# Altium PCB PCB1.PcbDoc (part 2 of 2)
Units mm, origin at the board's own origin, x right, y up, seen from the top; angles counter-clockwise.
Board outline 74.3 x 80 mm, 4 copper layers (Top Layer, GND_PLANE, PWR_PLANE, Bottom Layer), stack 0.603 mm thick; 83 components, 65 nets, 320 pads, 166 vias.
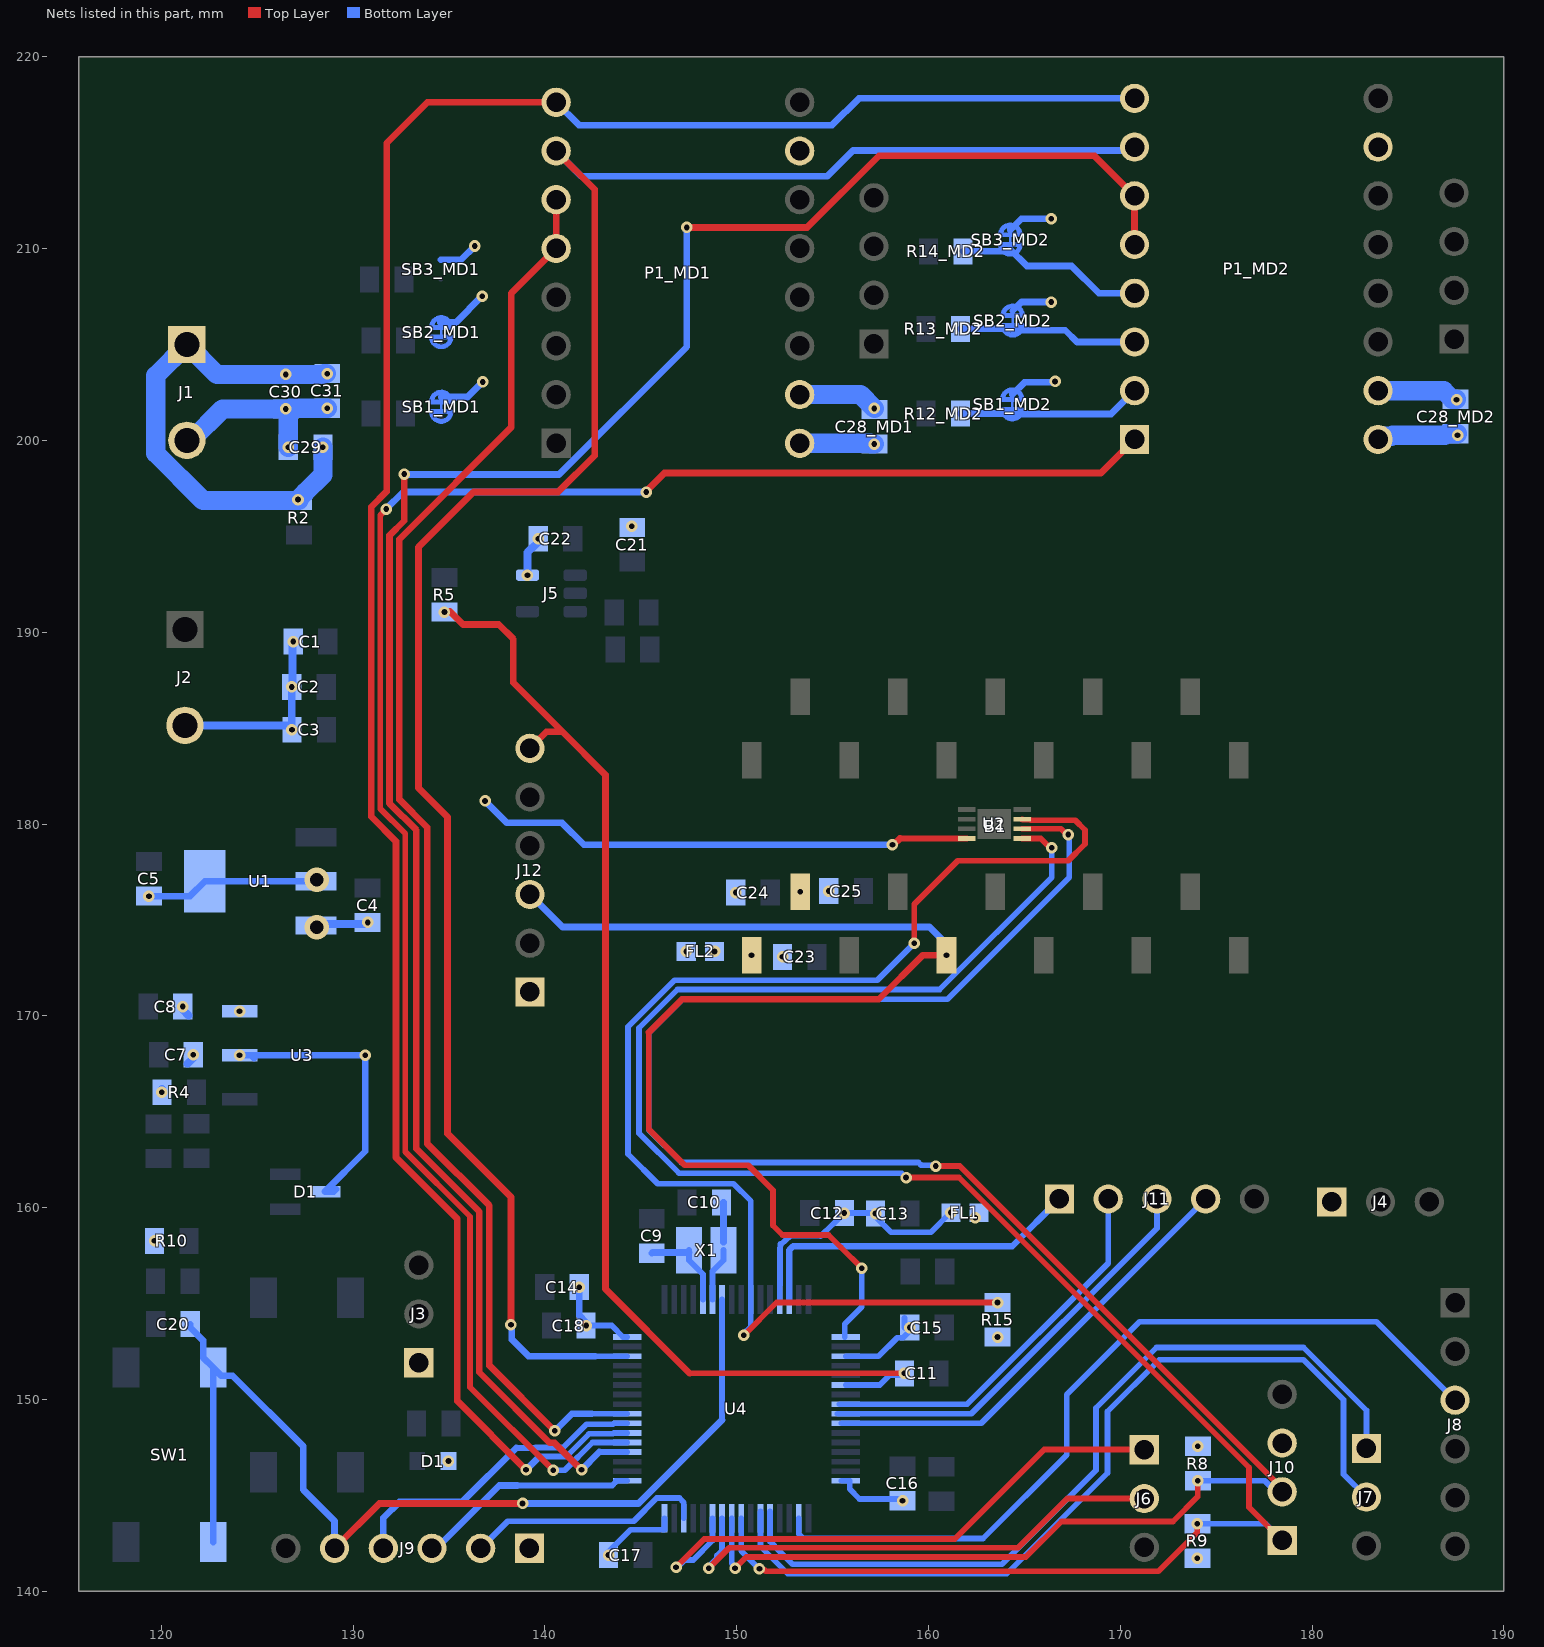
[diagram p4: the nets of this part, all layers, seen from the top]

## Via types
v1: diameter 0.6, hole 0.3, Top Layer to Bottom Layer, 163 vias
v2: diameter 1.27, hole 0.711, Top Layer to Bottom Layer, 3 vias

## Nets (pads, with @x,y where several pads share a name; then routed paths per layer and width w, separated by ;. In a path a pad name is that pad's centre, name@x,y a point inside that pad or via, vN(x,y) a via of type N, cw(c..) or ccw(c..) an arc to the next point about the centre after c; other vN are vias at no path point) (continued)
NetP1_MD1_5: P1_MD1.5 P1_MD1.6 U4.56 | length 75.1
  Top Layer w0.35: v1(140.513,148.361) 137.102,151.772 137.102,160.104 133.858,163.347 133.858,179.832 132.409,181.281 132.409,194.846 138.252,200.689 138.252,207.675 P1_MD1.5@140.585,210.008 P1_MD1.6@140.585,212.548
  Bottom Layer w0.3: 142.439,149.254 U4.56@144.287,149.254
  Bottom Layer w0.35: v1(140.513,148.361) 141.406,149.254 142.439,149.254
NetP1_MD1_7: P1_MD1.7 P1_MD2.7 U4.62 | length 108.9
  Top Layer w0.35: v1(138.227,153.899) 138.227,160.553 134.925,163.855 134.925,180.365 133.409,181.881 133.409,194.432 136.284,197.307 140.691,197.307 142.596,199.212 142.596,213.077 P1_MD1.7@140.585,215.088
  Bottom Layer w0.3: 142.621,152.254 U4.62@144.287,152.254
  Bottom Layer w0.35: v1(138.227,153.899) 138.275,153.851 138.275,153.114 139.134,152.254 142.621,152.254 ; P1_MD1.7@140.585,215.088 141.906,213.766 154.711,213.766 156.058,215.113 170.561,215.113 P1_MD2.7@170.739,215.29
NetP1_MD1_8: P1_MD1.8 P1_MD2.8 U4.54 | length 119.9
  Top Layer w0.35: v1(139.014,146.329) 135.433,149.911 135.433,159.41 132.232,162.611 132.232,179.095 130.945,180.383 130.945,196.522 131.75,197.327 131.75,215.494 133.884,217.628 P1_MD1.8@140.585,217.628
  Bottom Layer w0.3: 139.709,147.024 141.119,147.024 142.3,148.204 143.549,148.204 143.599,148.254 U4.54@144.287,148.254
  Bottom Layer w0.35: v1(139.014,146.329) 139.709,147.024 ; P1_MD1.8@140.585,217.628 141.779,216.433 154.968,216.433 156.365,217.83 P1_MD2.8@170.739,217.83
NetP1_MD2_1: P1_MD2.1 U4.53 | length 99
  Top Layer w0.3: v1(131.724,196.418) 131.724,196.397 131.42,196.092 131.42,180.797 132.715,179.502 132.715,162.916 136.101,159.53 136.101,150.64 v1(140.437,146.304)
  Top Layer w0.35: v1(145.288,197.307) 145.288,197.358 146.228,198.298 168.986,198.298 P1_MD2.1@170.739,200.05
  Bottom Layer w0.3: v1(140.437,146.304) 141.036,146.304 142.486,147.754 U4.53@144.287,147.754
  Bottom Layer w0.35: v1(131.724,196.418) 132.613,197.307 v1(145.288,197.307)
NetP1_MD2_2: P1_MD2.2 R12_MD2.2 SB1_MD2.1 | length 9.6
  Bottom Layer w0.35: R12_MD2.2@161.671,201.397 164.338,201.397 SB1_MD2.1@164.363,201.371 169.52,201.371 P1_MD2.2@170.739,202.59
NetP1_MD2_3: P1_MD2.3 R13_MD2.2 SB2_MD2.1 | length 9.4
  Bottom Layer w0.35: R13_MD2.2@161.671,205.816 164.313,205.816 SB2_MD2.1@164.389,205.74 167.128,205.74 167.737,205.13 P1_MD2.3@170.739,205.13
NetP1_MD2_4: P1_MD2.4 R14_MD2.2 SB3_MD2.1 | length 9.9
  Bottom Layer w0.35: R14_MD2.2@161.798,209.855 164.16,209.855 SB3_MD2.1@164.262,209.956 165.125,209.093 167.462,209.093 168.885,207.67 P1_MD2.4@170.739,207.67
NetP1_MD2_5: P1_MD2.5 P1_MD2.6 U4.52 | length 111.3
  Top Layer w0.35: v1(132.664,198.247) 132.664,195.809 131.902,195.047 131.902,181.077 133.299,179.68 133.299,163.068 136.576,159.791 136.576,151.415 140.254,147.736 140.503,147.736 v1(141.91,146.329) ; v1(147.396,211.099) 153.67,211.099 157.404,214.833 168.656,214.833 P1_MD2.6@170.739,212.75 P1_MD2.5@170.739,210.21
  Bottom Layer w0.3: 142.835,147.254 U4.52@144.287,147.254
  Bottom Layer w0.35: v1@132.664,198.222 140.74,198.222 147.396,204.878 v1(147.396,211.099) ; v1(141.91,146.329) 142.835,147.254
NetR15_1: R15.1 U2.3 U4.10 | length 68.4
  Top Layer w0.3: v1(150.368,153.34) 152.081,155.053 v1(163.601,155.053) ; v1(159.258,173.787) 159.258,175.819 161.519,178.079 167.284,178.079 168.162,178.957 168.162,179.682 167.643,180.2 165.331,180.2 165.303,180.227 164.902,180.227 U2.3@164.88,180.25
  Bottom Layer w0.3: v1(150.368,153.34) 150.368,153.421 150.737,153.79 U4.10@150.737,155.204 150.737,160.347 149.835,161.249 145.886,161.249 144.336,162.799 144.336,169.433 146.76,171.856 157.328,171.856 v1(159.258,173.787)
NRST: C20.1 J9.05 SW1.3 SW1.4 U4.7 | length 53.5
  Top Layer w0.35: J9.05@129.032,142.24 131.369,144.577 v1(138.836,144.577)
  Bottom Layer w0.3: 149.237,148.932 U4.7@149.237,155.204
  Bottom Layer w0.35: C20.1@121.51,153.924 121.51,153.749 122.182,153.077 122.182,152.188 SW1.3@122.707,151.663 ; SW1.4@122.707,142.563 122.707,151.313 SW1.3@122.707,151.663 ; J9.05@129.032,142.24 129.032,143.662 127.406,145.288 127.406,147.549 123.727,151.228 123.143,151.228 SW1.3@122.707,151.663 ; v1(138.836,144.577) 144.882,144.577 149.237,148.932
OS: C11.2 J12.06 R5.1 U4.22 | length 62.5
  Top Layer w0.3: 147.549,151.359 v1(158.739,151.359)
  Top Layer w0.35: v1@135.052,191.073 135.727,190.398 137.592,190.398 138.354,189.636 138.354,187.363 140.906,184.81 ; J12.06@139.217,183.947 140.081,184.81 140.906,184.81 ; 147.549,151.359 143.154,155.753 143.154,182.562 140.906,184.81
  Bottom Layer w0.3: U4.22@155.687,150.754 157.46,150.754 157.965,151.259 158.64,151.259 v1(158.739,151.359)
  other v1: 134.763,191.047
OSC1: C9.2 U4.5 X1.2 | length 4.8
  Bottom Layer w0.3: X1.2@147.512,157.785 147.512,157.255 148.237,156.53 U4.5@148.237,155.204
  Bottom Layer w0.35: C9.2@145.567,157.621 145.607,157.661 X1.2@147.512,157.661
OSC2: C10.2 U4.6 X1.1 | length 4.9
  Bottom Layer w0.3: U4.6@148.737,155.204 148.737,156.68 149.312,157.255 X1.1@149.312,157.785
  Bottom Layer w0.35: X1.1@149.312,158.191 C10.2@149.312,160.274
PGND: C28_MD1.2 C28_MD2.2 C29.1 C30.1 C31.1 J1.1 P1_MD1.15 P1_MD2.15 R2.1 | length 34.7
  Bottom Layer w1: C30.1@126.667,203.44 v1(126.492,203.44) ; v1(127.127,196.912) 127.508,197.293 128.352,198.136 ; R2.1@127.178,196.861 122.176,196.861 119.711,199.327 119.711,203.375 J1.1@121.336,205 122.896,203.44 v1(126.492,203.44) ; 128.422,198.207 128.422,199.469 v1(128.422,199.644) C29.1@128.422,199.569 ; C31.1@128.611,203.479 128.476,203.479 128.436,203.44 v1(126.492,203.44) ; P1_MD1.15@153.285,202.388 156.453,202.388 v1(157.175,201.665) ; P1_MD2.15@183.439,202.59 186.856,202.59 187.302,202.144 C28_MD2.2@187.528,202.144
  other v1: 187.528,202.122 128.651,203.479
RES1: J11.02 U4.24 | length 20.4
  Bottom Layer w0.3: U4.24@155.364,149.754 162.023,149.754 169.367,157.099 J11.02@169.367,160.452
RES2: J11.03 U4.25 | length 22.2
  Bottom Layer w0.3: U4.25@155.25,149.254 162.232,149.254 171.907,158.929 J11.03@171.907,160.452
RES3: J11.04 U4.26 | length 23.8
  Bottom Layer w0.3: U4.26@155.466,148.754 162.75,148.754 J11.04@174.447,160.452
RX_D: J7.02 U4.38 | length 45.7
  Bottom Layer w0.3: U4.38@151.236,144.161 151.236,142.337 152.654,140.919 164.084,140.919 169.329,146.164 169.329,149.365 172.034,152.07 179.553,152.07 181.635,149.987 181.635,146.101 J7.02@182.829,144.907
RX_P: J6.02 U4.42 | length 27.1
  Top Layer w0.3: v1(148.539,141.199) 149.606,142.265 164.668,142.265 167.234,144.831 J6.02@171.247,144.831
  Bottom Layer w0.3: v1(148.539,141.199) 148.539,141.28 148.978,141.718 148.978,141.865 149.237,142.124 U4.42@149.237,143.804
SCL: J10.01 R9.1 U2.1 U4.40 | length 109.1
  Top Layer w0.3: v1(151.181,141.173) 151.238,141.116 151.437,141.116 151.507,141.046 171.983,141.046 174.006,143.069 174.006,143.512 v1(174.015,143.521) ; v1(158.826,161.569) 161.595,161.569 176.708,146.456 176.708,144.374 J10.01@178.435,142.646 ; U2.1@164.88,179.25 165.855,179.25 166.34,178.765 v1(166.421,178.765)
  Bottom Layer w0.3: U4.40@150.237,143.804 150.237,142.102 151.166,141.173 v1(151.181,141.173) ; v1(158.826,161.569) 158.598,161.798 146.99,161.798 144.907,163.881 144.907,169.367 146.914,171.374 160.579,171.374 166.421,177.216 v1(166.421,178.765) ; v1(174.015,143.521) 177.56,143.521 J10.01@178.435,142.646
SCLK: J8.03 U4.34 | length 43.4
  Bottom Layer w0.3: U4.34@153.237,143.804 153.237,142.98 153.463,142.754 162.846,142.754 167.201,147.11 167.201,150.259 170.997,154.055 183.359,154.055 J8.03@187.452,149.962
SDA: J10.02 R8.1 U2.2 U4.41 | length 109.9
  Top Layer w0.3: v1(149.911,141.199) 150.495,141.783 165.072,141.783 166.926,143.637 172.745,143.637 174.041,144.932 v1(174.041,145.76) ; v1(160.376,162.169) 161.631,162.169 178.435,145.366 J10.02@178.435,145.186 ; U2.2@164.88,179.75 166.904,179.75 167.203,179.451 v1(167.284,179.451)
  Bottom Layer w0.3: U4.41@149.737,143.804 149.737,141.454 149.911,141.28 v1(149.911,141.199) ; v1(160.376,162.169) 160.338,162.207 159.626,162.207 159.476,162.357 147.117,162.357 145.415,164.059 145.415,169.113 147.168,170.866 160.985,170.866 167.335,177.216 167.335,179.4 v1(167.284,179.451) ; v1(174.041,145.76) 177.531,145.76 178.104,145.186 J10.02@178.435,145.186
SH: B1.5 J12.03 U4.17 | length 64.7
  Top Layer w0.3: 145.415,169.139 145.415,164.084 147.295,162.204 150.597,162.204 151.892,160.909 151.892,159.068 152.388,158.572 154.788,158.572 155.44,157.92 v1(156.515,156.845)
  Top Layer w0.35: 145.415,169.139 147.142,170.866 157.404,170.866 159.701,173.163 v1(160.936,173.163)
  Bottom Layer w0.3: U4.17@155.636,153.254 155.636,153.934 156.515,154.813 v1(156.515,156.845)
  Bottom Layer w0.35: J12.03@139.217,176.327 140.919,174.625 160.045,174.625 160.936,173.735 v1(160.936,173.163)
SWCLK: J9.03 U4.49 | length 11.7
  Bottom Layer w0.3: 138.567,145.517 143.511,145.517 143.687,145.692 143.687,145.754 U4.49@144.287,145.754
  Bottom Layer w0.35: J9.03@134.112,142.24 134.341,142.24 137.617,145.517 138.567,145.517
SWDIO: J9.02 U4.46 | length 12.6
  Bottom Layer w0.3: J9.02@136.652,142.24 138.066,143.654 144.631,143.654 145.831,144.854 147.011,144.854 147.237,144.629 U4.46@147.237,143.804
SWO: J9.04 U4.55 | length 16.3
  Bottom Layer w0.3: 138.506,147.472 139.485,147.472 139.512,147.499 140.958,147.499 142.163,148.704 143.549,148.704 143.599,148.754 U4.55@144.287,148.754
  Bottom Layer w0.35: J9.04@131.572,142.24 131.572,143.815 132.41,144.653 135.687,144.653 138.506,147.472
TX_D: J7.01 U4.37 | length 43.1
  Bottom Layer w0.3: U4.37@151.736,144.161 151.736,142.599 151.937,142.398 151.937,142.371 152.904,141.404 163.833,141.404 168.732,146.304 168.732,149.555 171.882,152.705 179.554,152.705 182.829,149.43 J7.01@182.829,147.447
TX_P: J6.01 U4.43 | length 30.6
  Top Layer w0.3: v1(146.837,141.249) 148.311,142.723 161.371,142.723 166.033,147.384 171.234,147.384 J6.01@171.247,147.371
  Bottom Layer w0.3: v1(146.837,141.249) 146.919,141.249 147.301,141.632 147.728,141.632 148.737,142.641 U4.43@148.737,143.804
VBB: C28_MD1.1 C28_MD2.1 C29.2 C30.2 C31.2 J1.2 P1_MD1.16 P1_MD2.16 | length 18.1
  Bottom Layer w1: J1.2@121.336,200 121.556,200 123.196,201.64 126.622,201.64 v1(126.622,199.644) ; C30.2@126.667,201.64 126.707,201.679 v1(128.651,201.679) ; P1_MD1.16@153.285,199.848 156.963,199.848 157,199.811 v1(157.175,199.811) ; P1_MD2.16@183.439,200.05 183.599,200.211 184.128,200.211 184.185,200.268 186.933,200.268 187.01,200.344 C28_MD2.1@187.579,200.344
  other v1: 187.579,200.268 126.492,201.64
VCC: C1.2 C2.2 C3.2 C4.2 C8.2 J2.2 U1.3 U3.3 | length 13.6
  Bottom Layer w0.406: v1(121.118,170.485) 121.118,170.312 C8.2@121.415,170.015 ; J2.2@121.234,185.141 126.583,185.141 v1(126.811,184.912) 126.806,184.917 126.806,187.142 v1(126.8,187.147) 126.838,187.185 126.838,189.471 v1(126.876,189.509) ; v2(128.113,174.625) 128.279,174.79 130.681,174.79 v1(130.759,174.868)
  other v1: 124.079,170.243
VDD: C5.2 C14.1 C15.1 C16.1 C17.1 C18.1 D1.A FL1.1 J3.01 J4.01 J9.01 J10.03 J12.01 P1_MD1.10 P1_MD2.10 R8.2 R9.2 R10.2 R15.2 SB1_MD1.2 SB1_MD2.2 SB2_MD1.2 SB2_MD2.2 SB3_MD1.2 SB3_MD2.2 U1.2 U1.4 U2.8 U4.19 U4.32 U4.48 U4.64 | length 67.3
  Top Layer w0.3: 158.515,179.25 U2.8@161.99,179.25
  Top Layer w0.35: v1(158.115,178.918) 158.183,178.918 158.515,179.25
  Bottom Layer w0.3: v1(142.149,153.848) 143.48,153.848 144.073,153.254 U4.64@144.287,153.254 ; v1(143.321,141.884) 143.321,142.059 144.466,143.204 146.237,143.204 U4.48@146.237,143.804 ; U4.32@155.464,145.754 U4.32@155.687,145.754 155.888,145.754 155.888,145.33 156.404,144.815 158.61,144.815 C16.1@158.706,144.718 ; U4.19@155.687,152.254 156.375,152.254 156.382,152.248 157.392,152.248 158.366,153.221 158.668,153.221 159.018,153.571 v1(159.018,153.746) C15.1@159.018,153.921 ; C15.1@158.748,153.745 C15.1@158.748,154.244
  Bottom Layer w0.35: v1(119.355,176.24) 121.498,176.24 U1.4@122.271,177.013 128.037,177.013 v2(128.113,177.089) ; SB2_MD1.2@134.544,206.146 SB2_MD1.2@134.595,206.146 135.035,206.146 135.357,206.146 v1(136.728,207.518) ; SB3_MD1.2@134.569,209.423 135.636,209.423 v1(136.347,210.134) ; SB1_MD1.2@134.595,202.26 135.035,202.26 135.966,202.26 v1(136.754,203.048) ; v1(136.881,181.204) 138.024,180.061 140.89,180.061 142.033,178.918 v1(158.115,178.918) ; v1(141.794,155.854) 141.794,154.378 142.149,154.023 v1(142.149,153.848) ; C15.1@158.77,153.751 159.013,153.751 v1(159.018,153.746) ; SB3_MD2.2@164.262,210.972 164.846,211.557 v1(166.395,211.557) ; SB1_MD2.2@164.363,202.387 165.001,203.025 166.551,203.025 v1(166.599,203.073) ; SB2_MD2.2@164.389,206.756 164.846,207.213 v1(166.395,207.213)
  other v1: 174.015,141.721 158.648,144.718 134.973,146.787 174.041,147.56 163.601,153.253 119.648,158.267 162.439,159.47
VDDA: C12.1 C13.1 FL1.2 U4.13 | length 13.5
  Bottom Layer w0.3: U4.13@152.237,155.204 152.262,156.606 ccw(c151.962,156.611) 152.262,156.611 152.262,157.893 cw(c152.562,157.893) 152.266,157.939 152.285,158.066 ccw(c151.989,158.112) 152.289,158.106 ; 152.289,158.107 152.288,158.055 152.313,158.08 152.788,158.538 154.363,158.51 v1(155.611,159.715) 157.215,159.715 v1(157.24,159.69) 157.24,159.515 158.04,158.715 160.122,158.715 161.148,159.741 v1(161.163,159.741)
VTCD: B1.1 C7.2 C23.1 D1.3 FL2.1 R4.1 U3.2 U3.4 | length 16.1
  Bottom Layer w0.35: v1(124.079,167.945) U3.2@124.676,167.945 ; U3.2@124.831,167.79 U3.2@124.676,167.945 ; D1.3@128.537,160.845 130.632,162.94 v1(130.632,167.945) U3.2@124.676,167.945 ; D1.3@128.549,160.832 128.974,160.832 D1.3@129.104,160.962
  Bottom Layer w0.406: v1(120.029,166.014) R4.1@120.029,166.189 ; C7.2@121.369,167.498 121.666,167.795 v1(121.666,167.97) ; v1(147.372,173.355) FL2.1@147.387,173.355
  other v1: 152.389,173.076 150.776,173.163
VTCDA: B1.2 C21.1 C22.1 C24.1 C25.1 FL2.2 J5.5 | length 2.1
  Bottom Layer w0.406: v1(139.09,192.974) 139.09,194.159 139.328,194.397 139.356,194.397 139.653,194.694 v1(139.653,194.869)
  other v1: 148.842,173.355 149.951,176.428 153.316,176.463 154.802,176.505 144.526,195.518
WKUP: J11.01 U4.14 | length 17.8
  Bottom Layer w0.35: U4.14@152.737,155.204 152.737,157.783 152.942,157.988 164.363,157.988 J11.01@166.827,160.452
pads on no net: D1.2 U4.1 U4.2 U4.3 U4.4 U4.8 U4.9 U4.11 U4.20 U4.27 U4.39 U4.44 U4.45 U4.50 U4.51 U4.61

## Polygon pours and split planes (outlines as drawn)
GND on GND_PLANE (split plane): 226 vertices, not listed, extent 116.207,140.51 189.49,219.49
AGND on GND_PLANE (split plane): 227 vertices, not listed, extent 132.743,149.684 189.49,200.251
GND on GND_PLANE (split plane): 146.936,204.746 146.989,204.705 147.05,204.68 147.117,204.671 150.647,204.671 150.714,204.68 150.775,204.705 150.829,204.746 151.744,205.662 155.342,205.662 158.433,202.571 158.426,202.555 158.418,202.489 158.418,200.609 158.426,200.543 158.452,200.481 158.493,200.428 159.509,199.412 159.562,199.371 159.605,199.353 159.623,199.346 159.69,199.337 176.86,199.337 176.927,199.346 176.988,199.371 177.041,199.412 181.64,204.011 189.49,204.011 189.49,197.245 158.463,197.245 155.02,200.689 154.966,200.729 154.905,200.755 154.838,200.764 137.368,200.764 135.537,202.595 135.537,209.906 135.528,209.972 135.52,209.99 135.502,210.034 135.462,210.087 133.353,212.195 133.3,212.236 133.239,212.261 133.172,212.27 131.115,212.27 131.048,212.261 130.987,212.236 130.934,212.195 129.638,210.9 129.598,210.846 129.572,210.785 129.563,210.718 129.563,197.921 128.022,196.38 125.978,196.38 125.092,197.266 125.092,201.58 125.083,201.646 125.058,201.708 125.017,201.761 124.387,202.391 124.334,202.431 124.272,202.457 124.206,202.466 120.782,202.466 118.874,204.373 118.874,205.964 121.695,208.785 128.122,215.212 136.47,215.212
VTCD on PWR_PLANE (split plane): 246 vertices, not listed, extent 116.207,140.51 189.49,219.49
VCC on PWR_PLANE (split plane): 132.383,187.778 132.383,174.503 127.351,169.471 120.883,169.471 120.474,169.88 120.474,172.08 123.906,175.512 129.083,175.512 129.149,175.521 129.211,175.546 129.264,175.587 129.747,176.069 129.787,176.123 129.813,176.184 129.822,176.251 129.822,180.315 129.813,180.381 129.787,180.443 129.747,180.496 128.451,181.791 128.398,181.832 128.336,181.857 128.27,181.866 122.071,181.866 119.23,184.707 119.23,186.127 120.782,187.678 122.428,187.678 122.494,187.687 122.556,187.713 122.609,187.753 125.735,190.879 129.281,190.879
VTCD on PWR_PLANE (split plane): 149.07,189.731 149.109,189.722 149.147,189.712 149.66,189.631 149.7,189.628 149.74,189.625 189.49,189.625 189.49,170.375 150,170.375 149.74,170.375 149.7,170.372 149.66,170.369 149.147,170.288 149.109,170.278 149.07,170.269 148.8,170.182 143.744,175.238 143.691,175.279 143.629,175.304 143.563,175.313 138.481,175.313 138.414,175.304 138.396,175.297 138.353,175.279 138.3,175.238 136.191,173.13 136.151,173.077 136.125,173.015 136.116,172.949 136.116,168.483 131.491,163.858 120.451,163.858 118.569,165.74 118.569,168.067 119.461,168.959 127.457,168.959 127.524,168.967 127.585,168.993 127.638,169.034 132.82,174.215 138.511,179.906 144.394,179.906 145.285,179.016 145.338,178.975 145.399,178.95 145.466,178.941 145.507,178.946 147.877,176.576 147.877,172.542 147.885,172.476 147.911,172.414 147.952,172.361 148.637,171.675 148.691,171.635 148.709,171.627 148.752,171.609 148.819,171.6 149.25,171.6 149.317,171.609 149.378,171.635 149.432,171.675 149.889,172.132 149.929,172.186 149.955,172.247 149.964,172.314 149.964,172.542 149.964,173.972 150.2,174.209 150.563,174.572 156.626,174.572 156.692,174.581 156.754,174.606 156.807,174.647 157.712,175.552 157.753,175.605 157.778,175.667 157.787,175.733 157.787,177.749 157.778,177.816 157.771,177.834 157.753,177.877 157.712,177.93 156.721,178.921 156.668,178.962 156.607,178.987 156.54,178.996 152.938,178.996 148.579,183.355 148.579,189.89
no net on PWR_PLANE (split plane): 161.72,158.752 155.018,158.752 155.018,162.755 161.72,162.755
VTCDA on PWR_PLANE (split plane): 147.85,196.694 147.903,196.654 147.931,196.642 147.55,196.365 147.52,196.338 147.489,196.313 147.122,195.946 147.097,195.915 147.07,195.885 146.765,195.465 146.744,195.43 146.723,195.396 146.487,194.934 146.472,194.896 146.456,194.86 146.296,194.365 146.287,194.326 146.277,194.288 146.196,193.775 146.193,193.735 146.19,193.695 146.19,193.175 146.193,193.135 146.196,193.095 146.277,192.582 146.287,192.544 146.296,192.505 146.456,192.01 146.472,191.974 146.487,191.936 146.723,191.474 146.744,191.44 146.765,191.405 147.07,190.985 147.097,190.955 147.122,190.924 147.489,190.557 147.52,190.532 147.55,190.505 147.97,190.2 148.005,190.179 148.039,190.158 148.067,190.144 148.067,183.249 148.075,183.182 148.101,183.121 148.142,183.068 152.651,178.559 152.704,178.518 152.747,178.5 152.765,178.492 152.832,178.484 156.434,178.484 157.275,177.643 157.275,175.84 156.519,175.084 150.457,175.084 150.391,175.076 150.329,175.05 150.276,175.009 149.838,174.571 149.526,174.26 149.486,174.207 149.46,174.145 149.451,174.079 149.451,172.542 149.451,172.42 149.144,172.113 148.925,172.113 148.389,172.648 148.389,176.682 148.38,176.749 148.362,176.792 148.355,176.81 148.314,176.864 142.064,183.113 142.064,184.81 142.056,184.877 142.038,184.92 142.03,184.938 141.989,184.992 137.975,189.006 137.975,195.067 140.822,197.915 146.63,197.915
VBB on PWR_PLANE (split plane): 151.864,208.987 151.864,206.858 151.873,206.791 151.899,206.73 151.939,206.676 155.699,202.917 155.752,202.877 155.813,202.851 155.88,202.842 160.549,202.842 162.404,200.987 162.457,200.946 162.519,200.921 162.585,200.912 176.962,200.912 177.028,200.921 177.09,200.946 177.143,200.987 180.167,204.011 189.49,204.011 189.49,197.245 153.103,197.245 147.779,202.57 147.779,208.864 147.771,208.931 147.745,208.992 147.704,209.045 144.275,212.474 144.222,212.515 144.161,212.541 144.094,212.549 134.239,212.549 134.173,212.541 134.111,212.515 134.058,212.474 131.746,210.163 131.706,210.11 131.68,210.048 131.671,209.982 131.671,200.08 128.367,196.776 122.458,196.776 120.068,199.166 120.068,205.481 130.434,215.847 145.004,215.847

## Other copper
GND_PLANE (plane layer: these items are gaps in the copper):
  lines w0.508: 148.057,164.338 147.149,163.43 144.551,160.833 144.551,157.277 145.543,156.285 148.716,156.285 152.248,159.817 153.071,160.64 159.654,160.64 159.944,160.35 159.944,155.499 159.649,155.204 153.528,155.204 153.314,154.991 153.314,153.67 154.508,152.476 161.315,152.476 162.154,151.638 162.154,150.47 161.112,149.428 147.32,149.428 141.173,155.575 141.173,169.824 143.104,171.755 154.788,171.755 155.856,172.823 155.856,174.065 155.245,174.676 148.582,174.676 147.631,175.627 147.631,176.739 148.641,177.749 158.928,177.749 167.259,177.749 168.402,178.892 168.402,180.34 166.827,181.915 158.471,181.915 156.556,180 142.164,180 140.528,181.635 137.897,181.635 136.169,183.363 136.169,186.411 132.486,190.094 132.486,192.761 133.172,193.446 133.452,193.446 135.001,193.446 137.262,195.707 137.262,200.508 ; 158.648,202.717 155.448,205.918 151.638,205.918 150.647,204.927 147.117,204.927 136.576,215.468 130.023,215.468 128.016,215.468 121.514,208.966 118.618,206.07 118.618,204.267 120.675,202.209 124.206,202.209 124.836,201.58 124.836,197.16 125.872,196.124 128.128,196.124 129.819,197.815 129.819,210.718 131.115,212.014 133.172,212.014 135.28,209.906 135.28,202.489 137.262,200.508 ; 158.674,202.489 158.674,200.609 159.69,199.593 176.86,199.593 181.534,204.267 190.017,204.267 ; 159.766,196.875 158.471,196.875 154.838,200.508 148.793,200.508 137.262,200.508
PWR_PLANE (plane layer: these items are gaps in the copper):
  lines w0.508: 145.466,179.197 144.501,180.162 138.405,180.162 132.639,174.396 ; 147.533,195.52 147.559,195.52 ; 148.323,190.698 148.323,183.249 152.832,178.74 156.54,178.74 157.531,177.749 157.531,175.733 156.626,174.828 150.952,174.828 150.457,174.828 150.019,174.39 149.708,174.079 149.708,172.542 149.708,172.314 149.25,171.856 148.819,171.856 148.133,172.542 148.133,176.682 141.808,183.007 141.808,184.81 137.719,188.9 137.719,195.174 140.716,198.171 146.736,198.171 148.031,196.875 149.911,196.875 ; 149.011,169.608 143.563,175.057 140.678,175.057 138.481,175.057 136.373,172.949 136.373,168.377 131.597,163.601 120.345,163.601 118.313,165.633 118.313,168.173 119.355,169.215 120.777,169.215 ; 153.235,174.828 154.071,174.828 ; 153.276,196.71 147.523,202.463 147.523,208.864 144.094,212.293 134.239,212.293 131.928,209.982 131.928,199.974 128.473,196.52 122.352,196.52 119.812,199.06 119.812,205.588 130.327,216.103 145.11,216.103 152.121,209.093 152.121,206.858 155.88,203.098 160.655,203.098 162.585,201.168 176.962,201.168 180.061,204.267 190,204.267 ; 154.762,163.093 154.762,158.63 154.896,158.496 161.976,158.496 161.976,163.347 161.468,163.347 ; 120.777,169.215 127.457,169.215 132.639,174.396 ; 120.777,169.215 120.218,169.774 120.218,172.187 123.8,175.768 129.083,175.768 129.565,176.251 129.565,180.315 128.27,181.61 121.965,181.61 118.974,184.601 118.974,186.233 120.675,187.935 122.428,187.935 125.628,191.135 129.388,191.135 132.639,187.884 132.639,174.396

## Silkscreen, mask and mechanical layers (free items; w line width, h text height)
Bottom Overlay:
  text "GND" at 186.387,217.651 h0.4
  text "DIR" at 168.937,217.575 h0.4
  text "GND" at 151.868,217.448 h0.4
  text "DIR" at 138.876,217.384 h0.4
  text "STEP" at 169.089,215.136 h0.4
  text "VDD" at 186.844,214.857 h0.4
  text "STEP" at 138.851,214.793 h0.4
  text "VDD" at 151.792,214.73 h0.4
  text "NSLP" at 169.039,212.596 h0.4
  text "1B" at 185.752,212.546 h0.4
  text "1B" at 151.233,212.317 h0.4
  text "NSLP" at 138.825,212.304 h0.4
  text "NRST" at 168.988,210.056 h0.4
  text "1A" at 185.777,210.006 h0.4
  text "1A" at 151.182,209.752 h0.4
  text "NRST" at 138.8,209.738 h0.4
  text "-" at 118.16,208.613 h0.4 r90
  text "2A" at 185.828,207.516 h0.4
  text "MS3" at 168.962,207.491 h0.4
  text "2A" at 151.233,207.212 h0.4
  text "MS3" at 138.825,207.198 h0.4
  text "2B" at 185.803,204.976 h0.4
  text "MS2" at 169.013,204.9 h0.4
  text "MS2" at 138.851,204.734 h0.4
  text "2B" at 151.259,204.697 h0.4
  text "VMOT" at 116.639,203.329 h0.4 r90
  text "PGND" at 186.463,202.436 h0.4
  text "MS1" at 169.119,202.212 h0.4
  text "MS1" at 138.902,202.042 h0.4
  text "PGND" at 152.325,202.03 h0.4
  text "NENAB" at 169.14,199.795 h0.4
  text "VMOT" at 186.427,199.694 h0.4
  text "VMOT" at 152.452,199.541 h0.4
  text "NENAB" at 138.902,199.299 h0.4
  text "+" at 117.96,196.273 h0.4
  text "-" at 118.084,193.779 h0.4 r90
  text "VCC" at 116.639,188.724 h0.4 r90
  text "GND" at 137.391,183.868 h0.4
  text "+" at 118.62,181.236 h0.4
  text "OS" at 137.188,181.15 h0.4
  text "TEST" at 138.021,181.074 h0.4 r270
  text "ICG" at 137.289,178.712 h0.4
  text "fM" at 137.061,176.324 h0.4
  text "SH" at 137.086,173.632 h0.4
  text "VDD" at 137.264,171.041 h0.4
  text "RESERVED" at 173.383,162.151 h0.4
  text "BOOT1" at 184.483,162.1 h0.4
  text "BOOT1" at 184.33,158.163 h0.4
  text "RE3" at 175.516,158.138 h0.4
  text "GND" at 178.158,158.138 h0.4
  text "GND" at 186.794,158.138 h0.4
  text "WKUP" at 167.947,158.113 h0.4
  text "RE1" at 170.259,158.087 h0.4
  text "RE2" at 172.875,158.087 h0.4
  text "VDD" at 181.308,158.087 h0.4
  text "TEST" at 128.425,156.944 h0.4
  text "SPI" at 186.743,156.766 h0.4
  text "GND" at 135.075,156.563 h0.4 r270
  text "CS2" at 185.753,154.684 h0.4
  text "BOOT0" at 135.075,153.642 h0.4 r270
  text "CS1" at 185.778,152.372 h0.4
  text "VDD" at 135.486,152.326 h0.4 r90
  text "I2C" at 178.285,151.936 h0.4
  text "n.m." at 161.415,150.874 h0.4 r270
  text "GND" at 176.761,150.137 h0.4
  text "SCLK" at 185.778,149.781 h0.4
  text "UART" at 170.741,149.68 h0.4
  text "UART" at 182.349,149.654 h0.4
  text "PROG" at 170.843,149.019 h0.4
  text "DATA" at 182.349,149.019 h0.4
  text "TEST" at 132.209,148.872 h0.4 r90
  text "RST" at 116.792,148.211 h0.4 r90
  text "VDD" at 176.71,147.572 h0.4
  text "TX" at 181.181,147.318 h0.4
  text "TX" at 169.573,147.165 h0.4
  text "MISO" at 185.803,147.165 h0.4
  text "SDA" at 176.634,145.209 h0.4
  text "RX" at 181.155,144.778 h0.4
  text "RX" at 169.577,144.756 h0.4
  text "MOSI" at 185.803,144.676 h0.4
  text "SWO" at 132.235,144.041 h0.4
  text "GND" at 126.85,144.016 h0.4
  text "NRST" at 129.873,144.016 h0.4
  text "VDD" at 139.956,143.965 h0.4
  text "SWCLK" at 134.902,143.914 h0.4
  text "SWDIO" at 137.366,143.838 h0.4
  text "SWD" at 124.589,142.903 h0.4 r90
  text "SCL" at 176.659,142.593 h0.4
  text "GND" at 181.155,142.187 h0.4
  text "GND" at 169.573,142.161 h0.4
  text "GND" at 185.803,142.085 h0.4
Mechanical 1:
  circle w0.001: c138.5,166.565 r1.7
  circle w0.001: c187,180 r1.7
  circle w0.001: c176.87,208.5 r1.7
  lines w0.001: 190,163.265 150,163.265 cw(c150,166.565) 150,169.865 190,169.865 ; 190,190.135 150,190.135 cw(c150,193.435) 150,196.735 190,196.735
  lines w0.1: 190,163.265 190,169.865 ; 190,190.135 190,196.735 ; 115.697,140 190,140 190,220 115.697,220 115.697,140
Guias:
  lines w0.1: 115.748,180 190,180 ; 150,140 150,220 ; 163.435,140 163.435,220 ; 176.87,140 176.87,220